# Altium PCB FPGA_Quatro_PCB.PcbDoc (part 1 of 2)
Units mil, origin at the board's own origin, x right, y up, seen from the top; angles counter-clockwise.
Board outline 4724.41 x 3937.01 mil, 4 copper layers (Top Layer, Layer 2, Layer 3, Bottom Layer), stack 65.634 mil thick; 119 components, 184 nets, 749 pads, 206 vias.
Unrouted connection lines stored in the file: 83.
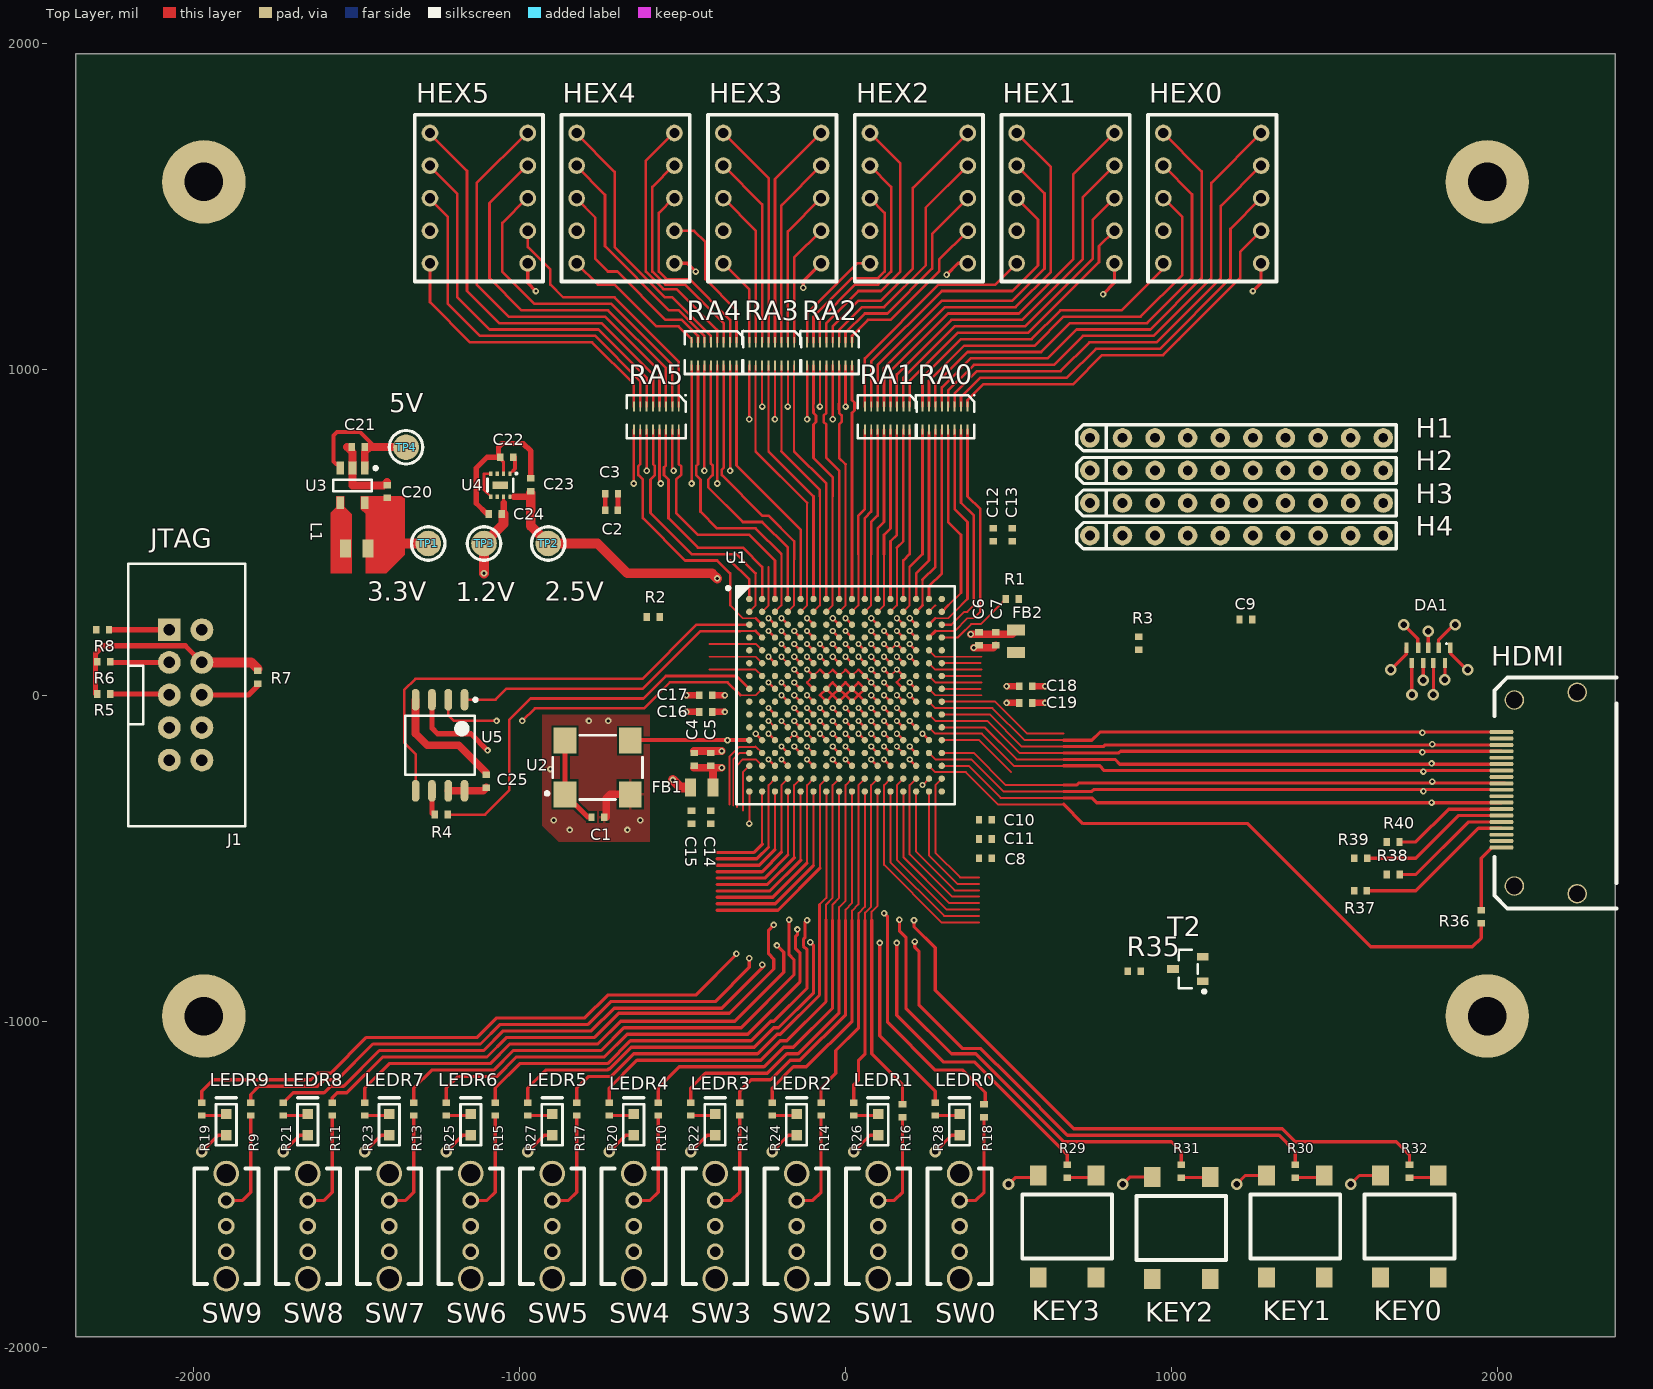
[diagram p0: Top Layer view]
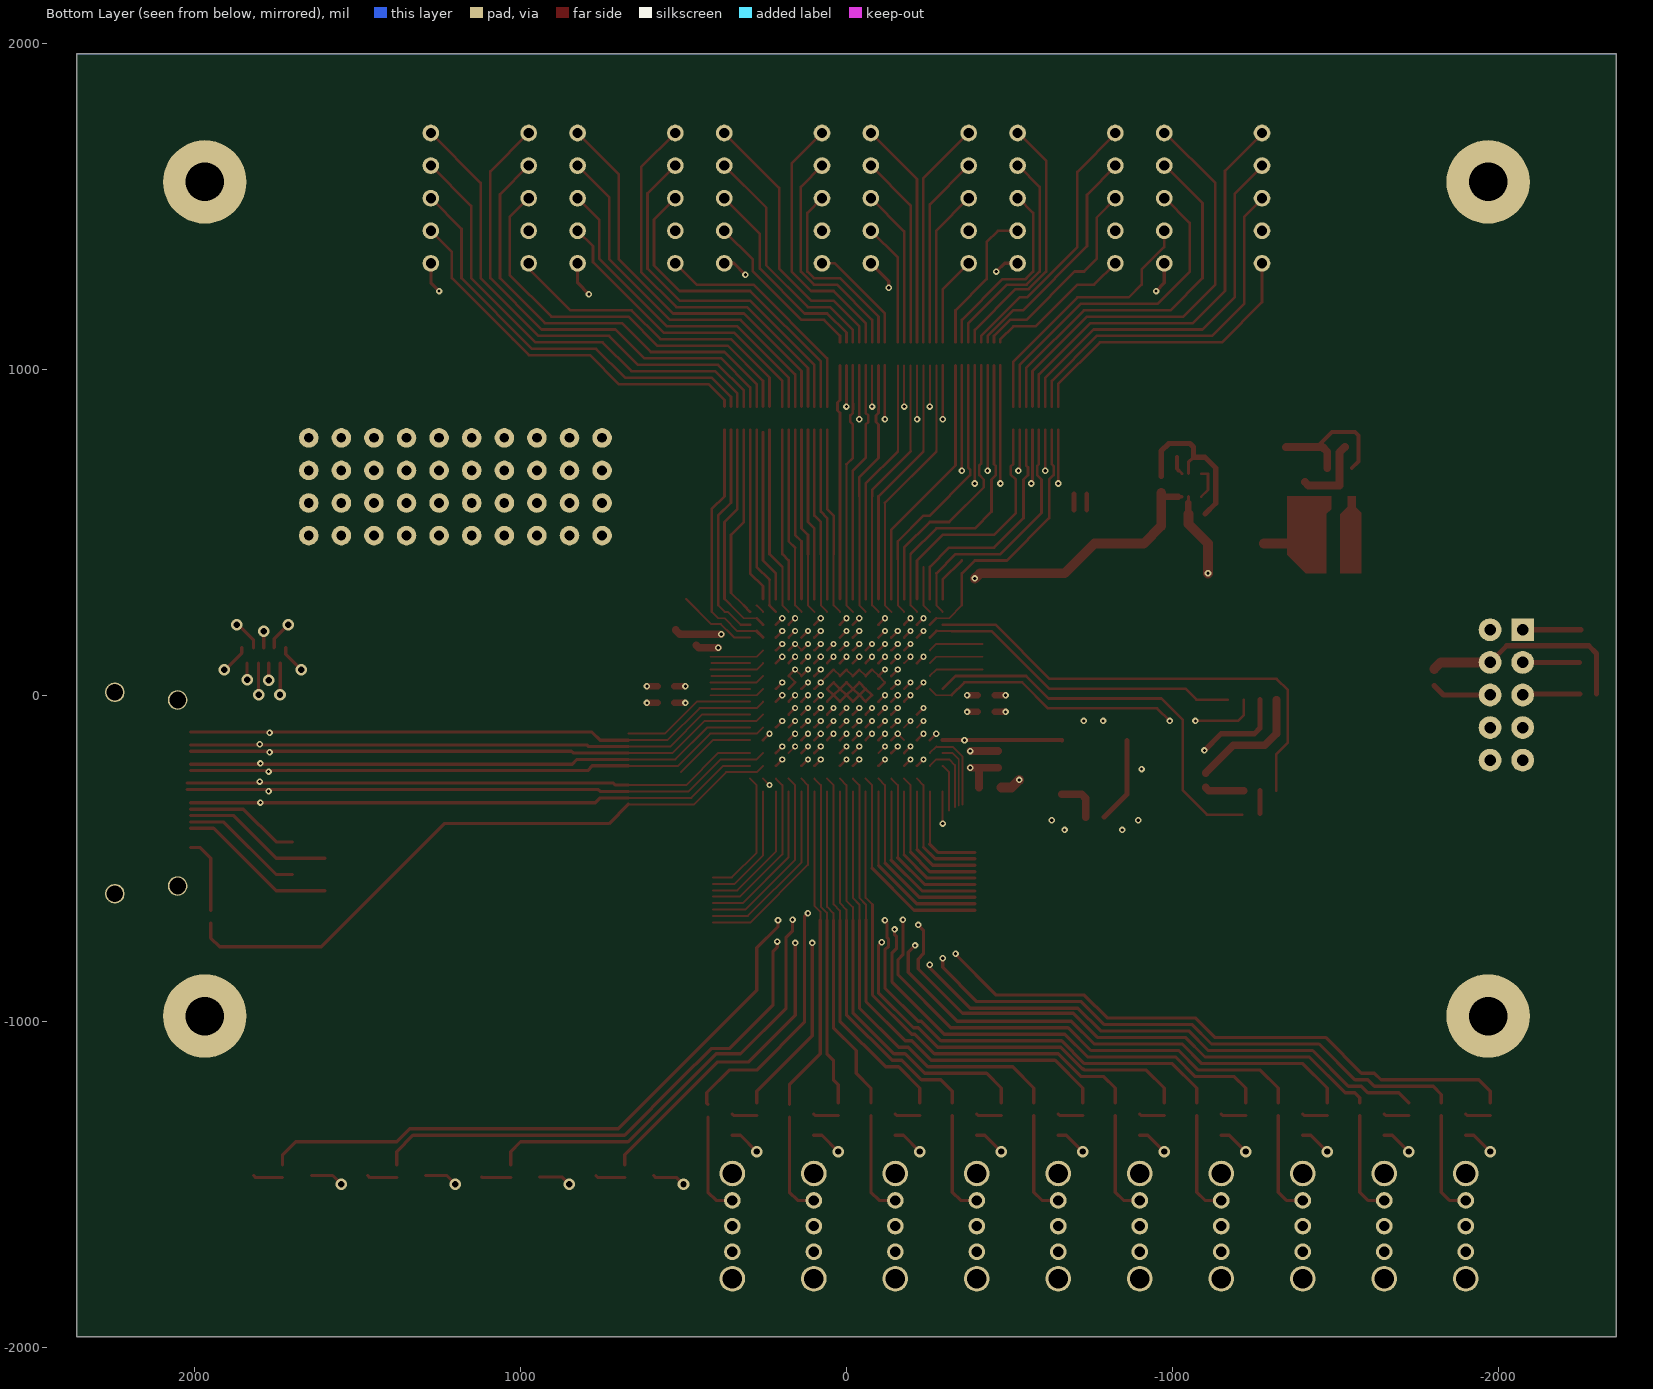
[diagram p1: Bottom Layer view, seen from below]
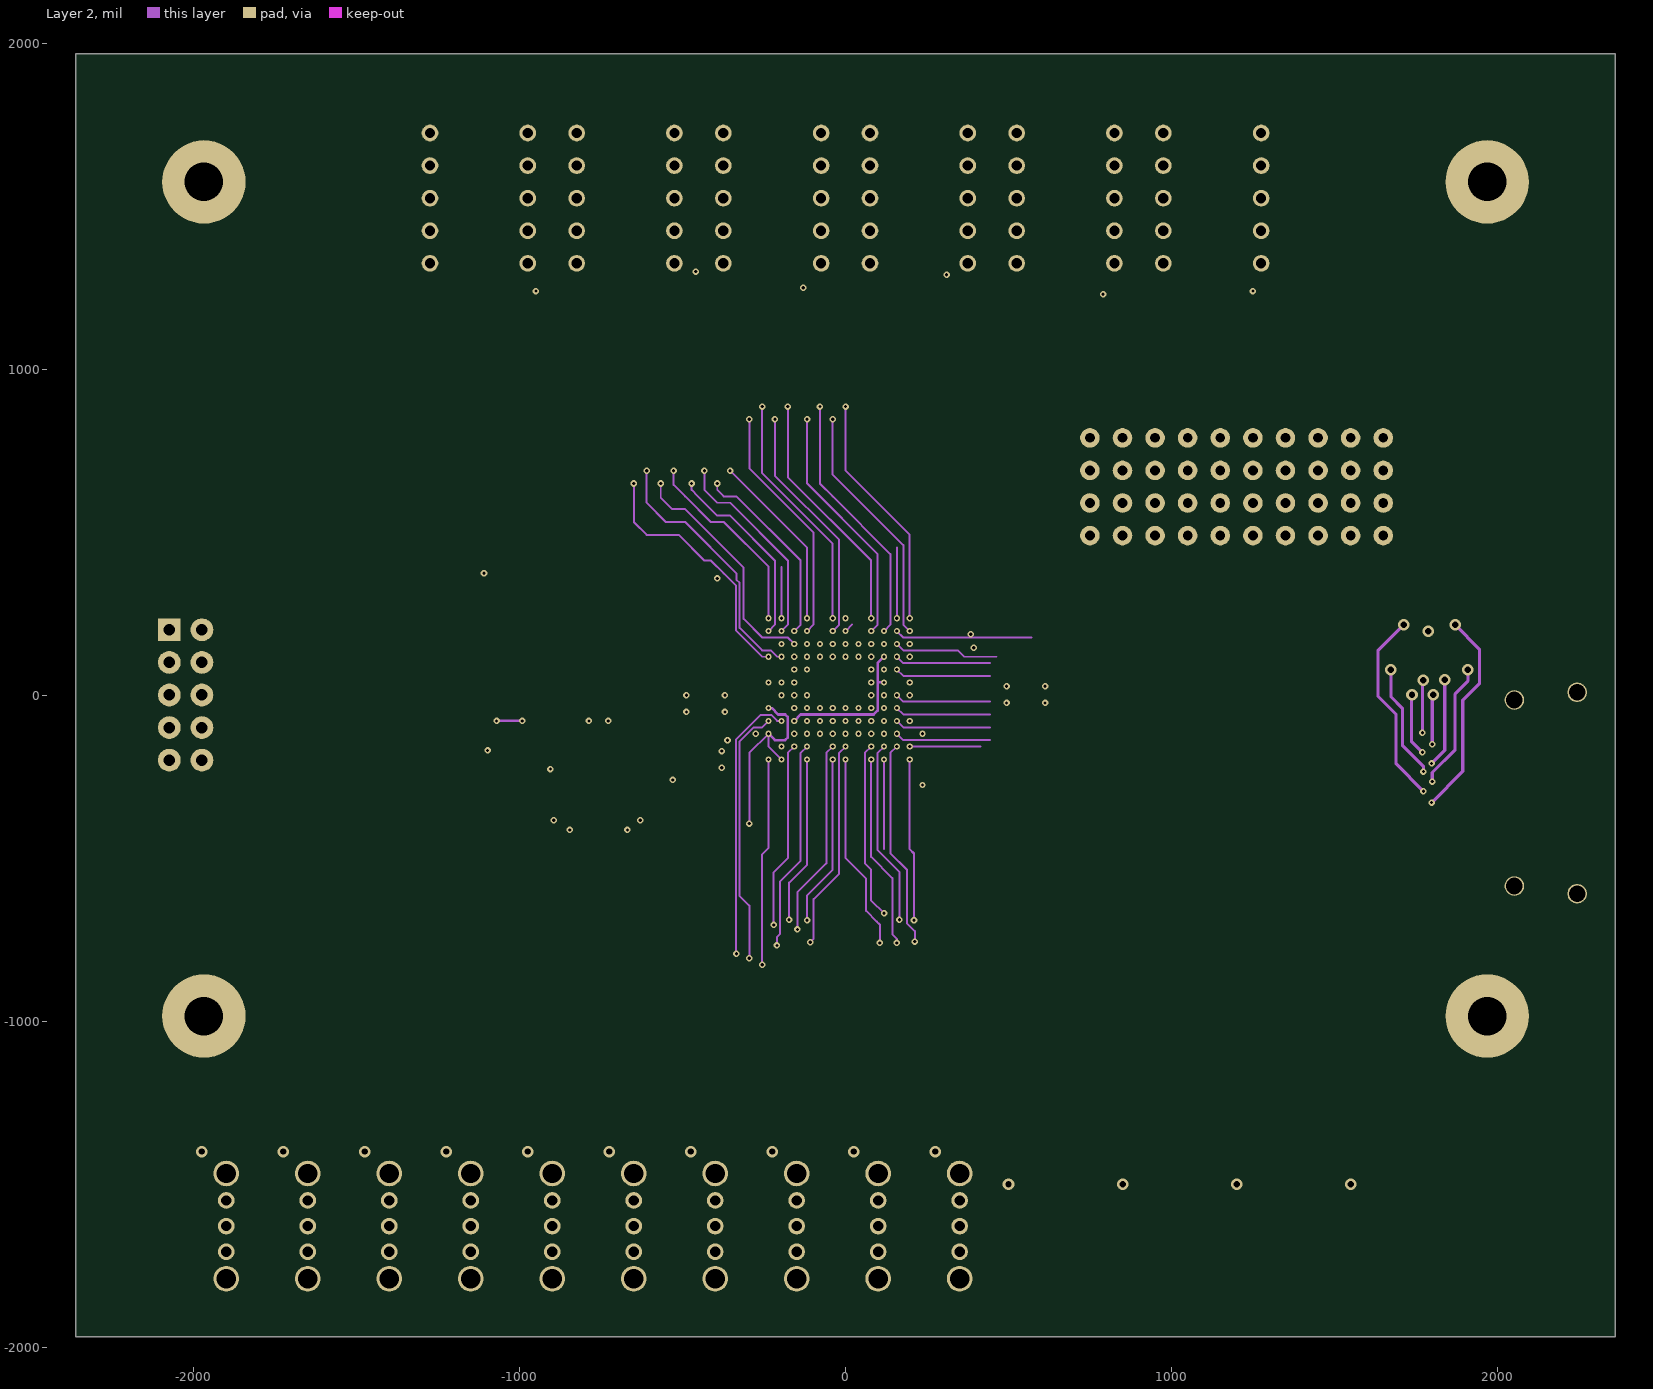
[diagram p2: Layer 2]
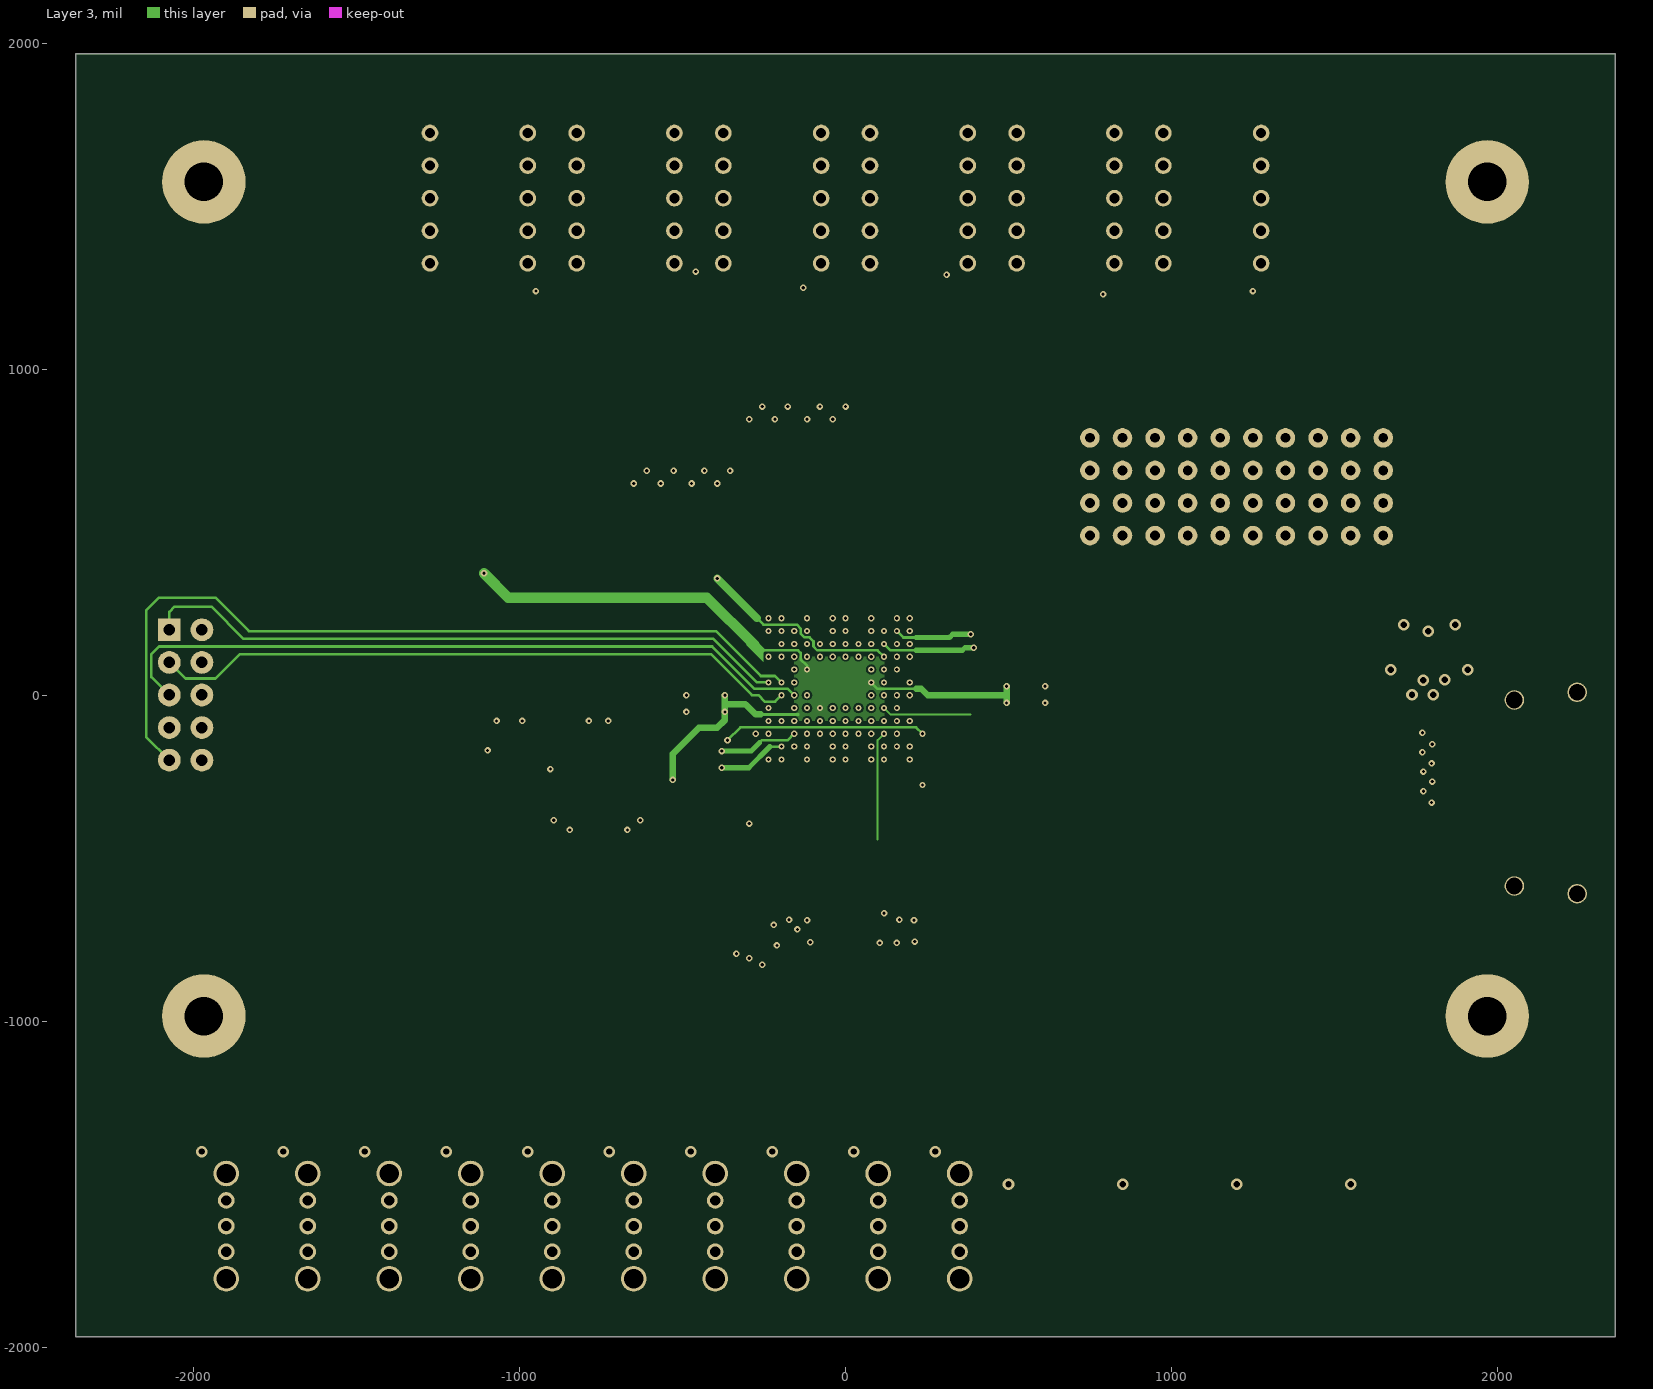
[diagram p3: Layer 3]
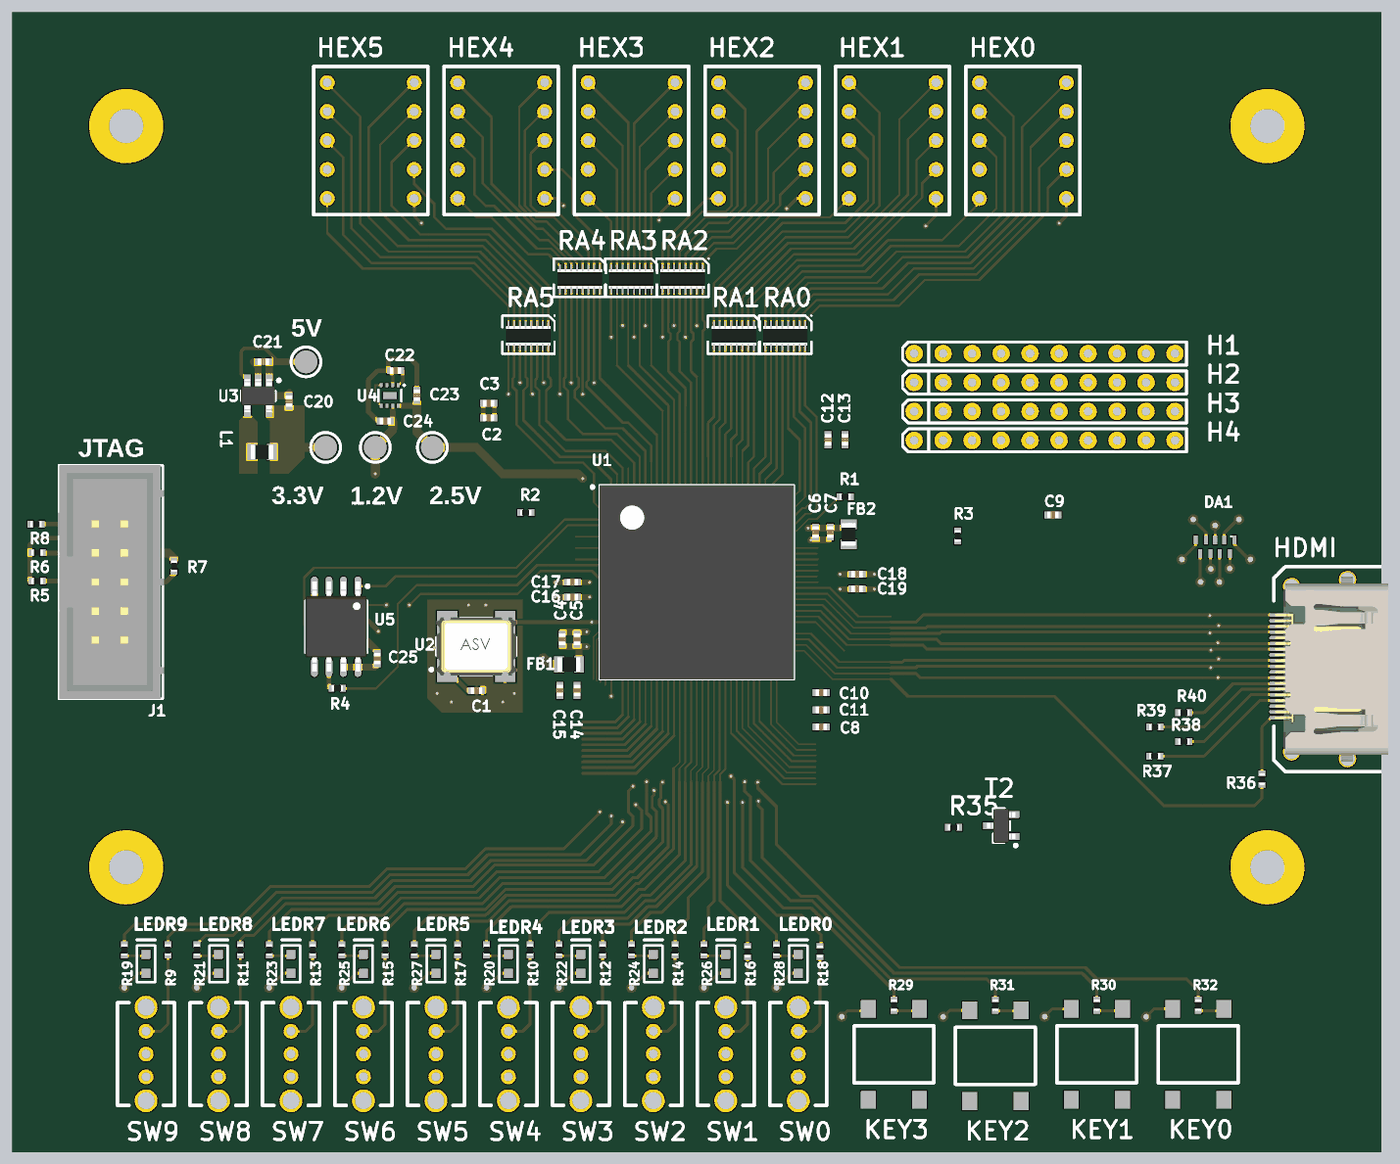
[diagram p5: 3D render of the assembled board from above, using the file's embedded part models]

## Layer stack, top to bottom
Top Solder: solder mask 0.4, Solder Resist, Dk 3.5
Top Layer: signal copper 1.4
Dielectric 1: prepreg 5, FR-4, Dk 4.2
Layer 2: signal copper 1.417
Dielectric 2: core 50, Dk 4.2
Layer 3: signal copper 1.417
Dielectric 3: prepreg 5, Dk 4.2
Bottom Layer: signal copper 1.4
Bottom Solder: solder mask 0.4, Solder Resist, Dk 3.5

## Board outline
-2362.2,-1968.5 2362.2,-1968.5 2362.2,1968.5 -2362.2,1968.5

## Design rules (kind name [scope] priority, off if disabled: settings)
BoardOutlineClearance [All] p1: gap=40 ignorepadtopadclearanceinfootprint=FALSE
Clearance [All] p1: gap=6 ignorepadtopadclearanceinfootprint=FALSE except(0: Arc-Hole Track-Hole SMDPad-Hole THPad-Hole Via-Hole Fill-Hole Poly-Hole Region-Hole Text-Hole)
ComponentClearance [All] p1: gap=9 collisioncheckmode=3 verticalgap=100000 showdistances=FALSE
PolygonConnect Polygon-Via [All vs IsVia] p1: connectstyle=Direct reliefconductorwidth=10 reliefentries=4 polygonreliefangle="90 Angle" airgapwidth=10
PolygonConnect [All] p2: connectstyle=Relief reliefconductorwidth=10 reliefentries=4 polygonreliefangle="90 Angle" airgapwidth=6
RoutingVias [All] p1: holewidth=10 width=20 viastyle="Through Hole" minholewidth=10 minwidth=19 maxholewidth=300 maxwidth=393.7
SilkToSilkClearance [All] p1: silktosilkclearance=8
SolderMaskExpansion [All] p1: expansion=4
Width [All] p1: maxlimit=500 minlimit=6 preferedwidth=10
28 further rules are at their usual default settings.

## Classes and differential pairs
component class HDMI: DA1 HDMI R36 R37 R38 R39 R40
component class Headers: H1 H2 H3 H4
component class Switch: R9 R10 R11 R12 R13 R14 R15 R16 R17 R18 SW0 SW1 SW2 SW3 SW4 SW5 SW6 SW7 SW8 SW9
component class SevenSeg: HEX0 HEX1 HEX2 HEX3 HEX4 HEX5 RA0 RA1 RA2 RA3 RA4 RA5
component class LED: LEDR0 LEDR1 LEDR2 LEDR3 LEDR4 LEDR5 LEDR6 LEDR7 LEDR8 LEDR9 R19 R20 R21 R22 R23 R24 R25 R26 R27 R28
component class Buttons: KEY0 KEY1 KEY2 KEY3 R29 R30 R31 R32
component class "Cyclone IV E": C1 C2 C3 C4 C5 C6 C7 C8 C9 C10 C11 C12 C13 C14 C15 C16 C17 C18 C19 C25 FB1 FB2 R1 R2 R3 R4 U1 U2 U5
component class Power: C20 C21 C22 C23 C24 L1 R35 T2 TP1 TP2 TP3 TP4 U3 U4
component class FPGA_Quatro_SCH_main: J1 R5 R6 R7 R8

## Components (designator, comment, footprint, x,y, rotation, side; value= is the part's Value field where it differs from the comment)
C1 "100nF" CAP0402R -759.84,-374.02 r0 top
C2 "100nF" CAP0402R -718.03,567.72 r0 top
C3 "100nF" CAP0402R -717.72,617.72 r0 top
C4 "100nF" CAP0402R -464.57,-196.85 r90 top
C5 "100nF" CAP0402R -413.39,-196.85 r90 top
C6 "100nF" CAP0402R 409.45,173.23 r270 top
C7 "100nF" CAP0402R 460.63,173.23 r270 top
C8 "100nF" CAP0402R 429.13,-500 r0 top
C9 "100nF" CAP0402R 1228.35,232.28 r0 top
C10 "100nF" CAP0402R 429.13,-381.89 r0 top
C11 "100nF" CAP0402R 429.13,-440.94 r0 top
C12 "100nF" CAP0402R 452.76,492.13 r90 top
C13 "100nF" CAP0402R 511.81,492.13 r90 top
C14 "100nF" CAP0402R -413.39,-374.02 r270 top
C15 "100nF" CAP0402R -472.44,-374.02 r270 top
C16 "100nF" CAP0402R -429.13,-51.18 r180 top
C17 "100nF" CAP0402R -429.13,0 r180 top
C18 "100nF" CAP0402R 553.15,27.56 r0 top
C19 "100nF" CAP0402R 553.15,-23.62 r0 top
C20 "100nF" CAP0402R -1406.5,625 r90 top
C21 "100nF" CAP0402R -1495.08,761.81 r180 top
C22 "100nF" CAP0402R -1039.37,730.31 r180 top
C23 "100nF" CAP0402R -965.55,645.67 r90 top
C24 "100nF" CAP0402R -1074.8,556.1 r180 top
C25 "100nF" CAP0402R -1102.36,-263.78 r90 top
DA1 "SP7538PUTG" 9-UDFN 1787.99,122.44 r180 top
FB1 "Value" RES0805R -440.94,-283.46 r0 top
FB2 "Value" RES0805R 523.62,165.35 r90 top
H1 "H 10x1" H10 1199.72,789.72 r0 top
H2 "H 10x1" H10 1199.72,689.72 r0 top
H3 "H 10x1" H10 1199.72,589.72 r0 top
H4 "H 10x1" H10 1199.72,489.72 r0 top
HDMI "HDMI" HDMI 2050,-300 r90 top
HEX0 "7-Segment display" Seven_Seg_INND-TS40 1125,1525 r0 top
HEX1 "7-Segment display" Seven_Seg_INND-TS40 675,1525 r0 top
HEX2 "7-Segment display" Seven_Seg_INND-TS40 225,1525 r0 top
HEX3 "7-Segment display" Seven_Seg_INND-TS40 -225,1525 r0 top
HEX4 "7-Segment display" Seven_Seg_INND-TS40 -675,1525 r0 top
HEX5 "7-Segment display" Seven_Seg_INND-TS40 -1125,1525 r0 top
J1 "JTAG" BOXEDVERT10 -2074.8,200.79 r270 top
KEY0 "Button" But_PTS645SMT 1730,-1630 r90 top
KEY1 "Button" But_PTS645SMT 1380,-1630 r90 top
KEY2 "Button" But_PTS645SMT 1029.98,-1634.73 r90 top
KEY3 "Button" But_PTS645SMT 680,-1630 r90 top
L1 "1uH" RES0805R -1500,450 r0 top
LEDR0 "LED" LED0603 350,-1317.52 r270 top
LEDR1 "LED" LED0603 100,-1317.52 r270 top
LEDR2 "LED" LED0603 -150,-1317.52 r270 top
LEDR3 "LED" LED0603 -400,-1317.52 r270 top
LEDR4 "LED" LED0603 -650,-1317.52 r270 top
LEDR5 "LED" LED0603 -900,-1317.52 r270 top
LEDR6 "LED" LED0603 -1150,-1317.52 r270 top
LEDR7 "LED" LED0603 -1400,-1317.52 r270 top
LEDR8 "LED" LED0603 -1650,-1317.52 r270 top
LEDR9 "LED" LED0603 -1900,-1317.52 r270 top
R1 "510K" RES0402R 511.81,295.27 r0 top
R2 "510K" RES0402R -590,240 r180 top
R3 "510K" RES0402R 900,159.68 r90 top
R4 "510K" RES0402R -1240.16,-366.14 r180 top
R5 "510K" RES0402R -2275.59,3.94 r180 top
R6 "510K" RES0402R -2275.59,102.36 r180 top
R7 "510K" RES0402R -1803.15,55.12 r270 top
R8 "510K" RES0402R -2279.53,200.79 r0 top
R9 "510K" RES0402R -1825,-1269.68 r270 top
R10 "510K" RES0402R -575,-1269.68 r270 top
R11 "510K" RES0402R -1575,-1269.68 r270 top
R12 "510K" RES0402R -325,-1269.68 r270 top
R13 "510K" RES0402R -1325,-1269.68 r270 top
R14 "510K" RES0402R -75,-1269.68 r270 top
R15 "510K" RES0402R -1075,-1269.68 r270 top
R16 "510K" RES0402R 175,-1275 r270 top
R17 "510K" RES0402R -825,-1269.68 r270 top
R18 "510K" RES0402R 425,-1275 r270 top
R19 "510K" RES0402R -1975,-1269.68 r90 top
R20 "510K" RES0402R -725,-1269.68 r90 top
R21 "510K" RES0402R -1725,-1269.68 r90 top
R22 "510K" RES0402R -475,-1269.68 r90 top
R23 "510K" RES0402R -1475,-1269.68 r90 top
R24 "510K" RES0402R -225,-1269.68 r90 top
R25 "510K" RES0402R -1225,-1269.68 r90 top
R26 "510K" RES0402R 25,-1269.68 r90 top
R27 "510K" RES0402R -975,-1269.68 r90 top
R28 "510K" RES0402R 275,-1269.68 r90 top
R29 "510K" RES0402R 680,-1460.31 r270 top
R30 "510K" RES0402R 1380,-1460.31 r270 top
R31 "510K" RES0402R 1030,-1460.31 r270 top
R32 "510K" RES0402R 1730,-1460.31 r270 top
R35 "510K" RES0402R 885.83,-846.46 r0 top
R36 "0" RES0402R 1950,-680 r270 top
R37 "0" RES0402R 1580,-600 r180 top
R38 "0" RES0402R 1680.32,-550 r180 top
R39 "0" RES0402R 1580.32,-500 r180 top
R40 "0" RES0402R 1680,-450 r180 top
RA0 "Resistor Array" EXB-2HV 305.12,850.39 r270 top value=560
RA1 "Resistor Array" EXB-2HV 127.95,850.39 r270 top value=560
RA2 "Resistor Array" EXB-2HV -49.21,1047.24 r270 top value=560
RA3 "Resistor Array" EXB-2HV -226.38,1047.24 r270 top value=560
RA4 "Resistor Array" EXB-2HV -403.54,1047.24 r270 top value=560
RA5 "Resistor Array" EXB-2HV -580.71,850.39 r270 top value=560
SW0 "SW" SW_OS102011MS2Q 350,-1628.74 r270 top
SW1 "SW" SW_OS102011MS2Q 100,-1628.74 r270 top
SW2 "SW" SW_OS102011MS2Q -150,-1628.74 r270 top
SW3 "SW" SW_OS102011MS2Q -400,-1628.74 r270 top
SW4 "SW" SW_OS102011MS2Q -650,-1628.74 r270 top
SW5 "SW" SW_OS102011MS2Q -900,-1628.74 r270 top
SW6 "SW" SW_OS102011MS2Q -1150,-1628.74 r270 top
SW7 "SW" SW_OS102011MS2Q -1400,-1628.74 r270 top
SW8 "SW" SW_OS102011MS2Q -1650,-1628.74 r270 top
SW9 "SW" SW_OS102011MS2Q -1900,-1628.74 r270 top
T2 "P MOSFT" SOT23_PMV48XP 1050,-840 r180 top
TP1 "TestPoint" TestPoint -1280.51,465.55 r270 top
TP2 "TestPoint" TestPoint -912.4,465.55 r0 top
TP3 "TestPoint" TestPoint -1109.25,465.55 r0 top
TP4 "TestPoint" TestPoint -1348.43,760.83 r270 top
U1 "EP4CE6F17C8" FBGA256 0,0 r0 top locked
U2 "Oscillator" CRYSTAL_7X5 -760.83,-221.46 r0 top
U3 "MCP1603T-330I/OS" SOT23-5 -1512.8,643.72 r270 top
U4 "MIC5331" TDFN22 -1059.06,644.69 r180 top
U5 "IS25LP064A" SOIC-8 -1244.09,-153.54 r270 top

## Footprints (in the part's own frame and the unit in brackets; to place one, negate y for a bottom-side part, rotate by r counter-clockwise, add the part's x,y. Pads: shape width x height; smd on the part's side, far side on the other; paste and mask are expansions set on the pad)
9-UDFN [mm] "Chip Array, Flat, 9-Leads, Pitch 0.80mm,  Body 3.80x1.00mm,  IPC Medium Density"
  rect 0.35x0.8 smd: 1(-1.7,-0.6) 2(-0.8,-0.6) 3(0,-0.6) 4(0.8,-0.6) 5(1.7,-0.6) 6(1.3,0.6) 7(0.4,0.6) 8(-0.4,0.6) 9(-1.3,0.6)
  silkscreen extent -1.46,-0.96 -1.36,-0.86, body extent -1.95,-0.55 1.95,0.55, height 0.55
BOXEDVERT10 [mil] "IDC Header 2.54mm Boxed 10 pins"
  rect 70x70 hole 35.43: 1(0,0)
  round 70 hole 35.43: 2(0,100) 3(100,0) 4(100,100) 5(200,0) 6(200,100) 7(300,0) 8(300,100) 9(400,0) 10(400,100)
  silkscreen extent -203,-126 603,232, body extent -204,-129 604,237, height 359
But_PTS645SMT [mm]
  rect 1.55x1.3 smd: 1(-3.975,2.25) 2(3.975,2.25) 3(-3.975,-2.25) 4(3.975,-2.25)
  silkscreen extent -2.5,-3.5 2.5,3.5, body extent -4.5,-3 4.5,3, height 4.3
CAP0402R [mm] "Capacitor 0402 reflow soldering"
  rect 0.5x0.6 smd: 1(-0.5,0) 2(0.5,0)
  body extent -0.5,-0.3 0.5,0.3, height 0.2
CRYSTAL_7X5 [mil]
  rect 70x80 smd: 1(-100,-82.5) 2(100,-82.5) 3(100,82.5) 4(-100,82.5)
  silkscreen extent -160,-98 138,98, body extent -138,-100 138,100, height 71
EXB-2HV [mm] "Panasonic 8 Res Convex SMD 1506"
  rect 0.8x0.15 smd: 1(-0.9,1.75) 2(-0.9,1.25) 3(-0.9,0.75) 4(-0.9,0.25) 5(-0.9,-0.25) 6(-0.9,-0.75) 7(-0.9,-1.25) 8(-0.9,-1.75) 9(0.9,-1.75) 10(0.9,-1.25) 11(0.9,-0.75) 12(0.9,-0.25) 13(0.9,0.25) 14(0.9,0.75) 15(0.9,1.25) 16(0.9,1.75)
  silkscreen extent -1.83,-2.29 1.57,2.34, body extent -0.9,-1.95 0.9,1.95, height 0.55
FBGA256 [mm] "BGA, 256-Leads, Body 17x17mm, Pitch 1mm"
  round 0.5 smd: A1(-7.5,7.5) A2(-6.5,7.5) A3(-5.5,7.5) A4(-4.5,7.5) A5(-3.5,7.5) A6(-2.5,7.5) A7(-1.5,7.5) A8(-0.5,7.5) A9(0.5,7.5) A10(1.5,7.5) A11(2.5,7.5) A12(3.5,7.5) A13(4.5,7.5) A14(5.5,7.5) A15(6.5,7.5) A16(7.5,7.5) B1(-7.5,6.5) B2(-6.5,6.5) B3(-5.5,6.5) B4(-4.5,6.5) B5(-3.5,6.5) B6(-2.5,6.5) B7(-1.5,6.5) B8(-0.5,6.5) B9(0.5,6.5) B10(1.5,6.5) B11(2.5,6.5) B12(3.5,6.5) B13(4.5,6.5) B14(5.5,6.5) B15(6.5,6.5) B16(7.5,6.5) C1(-7.5,5.5) C2(-6.5,5.5) C3(-5.5,5.5) C4(-4.5,5.5) C5(-3.5,5.5) C6(-2.5,5.5) C7(-1.5,5.5) C8(-0.5,5.5) C9(0.5,5.5) C10(1.5,5.5) C11(2.5,5.5) C12(3.5,5.5) C13(4.5,5.5) C14(5.5,5.5) C15(6.5,5.5) C16(7.5,5.5) D1(-7.5,4.5) D2(-6.5,4.5) D3(-5.5,4.5) D4(-4.5,4.5) D5(-3.5,4.5) D6(-2.5,4.5) D7(-1.5,4.5) D8(-0.5,4.5) D9(0.5,4.5) D10(1.5,4.5) D11(2.5,4.5) D12(3.5,4.5) D13(4.5,4.5) D14(5.5,4.5) D15(6.5,4.5) D16(7.5,4.5) E1(-7.5,3.5) E2(-6.5,3.5) E3(-5.5,3.5) E4(-4.5,3.5) E5(-3.5,3.5) E6(-2.5,3.5) E7(-1.5,3.5) E8(-0.5,3.5) E9(0.5,3.5) E10(1.5,3.5) E11(2.5,3.5) E12(3.5,3.5) E13(4.5,3.5) E14(5.5,3.5) E15(6.5,3.5) E16(7.5,3.5) F1(-7.5,2.5) F2(-6.5,2.5) F3(-5.5,2.5) F4(-4.5,2.5) F5(-3.5,2.5) F6(-2.5,2.5) F7(-1.5,2.5) F8(-0.5,2.5) F9(0.5,2.5) F10(1.5,2.5) F11(2.5,2.5) F12(3.5,2.5) F13(4.5,2.5) F14(5.5,2.5) F15(6.5,2.5) F16(7.5,2.5) G1(-7.5,1.5) G2(-6.5,1.5) G3(-5.5,1.5) G4(-4.5,1.5) G5(-3.5,1.5) G6(-2.5,1.5) G7(-1.5,1.5) G8(-0.5,1.5) G9(0.5,1.5) G10(1.5,1.5) G11(2.5,1.5) G12(3.5,1.5) G13(4.5,1.5) G14(5.5,1.5) G15(6.5,1.5) G16(7.5,1.5) H1(-7.5,0.5) H2(-6.5,0.5) H3(-5.5,0.5) H4(-4.5,0.5) H5(-3.5,0.5) H6(-2.5,0.5) H7(-1.5,0.5) H8(-0.5,0.5) H9(0.5,0.5) H10(1.5,0.5) H11(2.5,0.5) H12(3.5,0.5) H13(4.5,0.5) H14(5.5,0.5) H15(6.5,0.5) H16(7.5,0.5) J1(-7.5,-0.5) J2(-6.5,-0.5) J3(-5.5,-0.5) J4(-4.5,-0.5) J5(-3.5,-0.5) J6(-2.5,-0.5) J7(-1.5,-0.5) J8(-0.5,-0.5) J9(0.5,-0.5) J10(1.5,-0.5) J11(2.5,-0.5) J12(3.5,-0.5) J13(4.5,-0.5) J14(5.5,-0.5) J15(6.5,-0.5) J16(7.5,-0.5) K1(-7.5,-1.5) K2(-6.5,-1.5) K3(-5.5,-1.5) K4(-4.5,-1.5) K5(-3.5,-1.5) K6(-2.5,-1.5) K7(-1.5,-1.5) K8(-0.5,-1.5) K9(0.5,-1.5) K10(1.5,-1.5) K11(2.5,-1.5) K12(3.5,-1.5) K13(4.5,-1.5) K14(5.5,-1.5) K15(6.5,-1.5) K16(7.5,-1.5) L1(-7.5,-2.5) L2(-6.5,-2.5) L3(-5.5,-2.5) L4(-4.5,-2.5) L5(-3.5,-2.5) L6(-2.5,-2.5) L7(-1.5,-2.5) L8(-0.5,-2.5) L9(0.5,-2.5) L10(1.5,-2.5) L11(2.5,-2.5) L12(3.5,-2.5) L13(4.5,-2.5) L14(5.5,-2.5) L15(6.5,-2.5) L16(7.5,-2.5) M1(-7.5,-3.5) M2(-6.5,-3.5) M3(-5.5,-3.5) M4(-4.5,-3.5) M5(-3.5,-3.5) M6(-2.5,-3.5) M7(-1.5,-3.5) M8(-0.5,-3.5) M9(0.5,-3.5) M10(1.5,-3.5) M11(2.5,-3.5) M12(3.5,-3.5) M13(4.5,-3.5) M14(5.5,-3.5) M15(6.5,-3.5) M16(7.5,-3.5) N1(-7.5,-4.5) N2(-6.5,-4.5) N3(-5.5,-4.5) N4(-4.5,-4.5) N5(-3.5,-4.5) N6(-2.5,-4.5) N7(-1.5,-4.5) N8(-0.5,-4.5) N9(0.5,-4.5) N10(1.5,-4.5) N11(2.5,-4.5) N12(3.5,-4.5) N13(4.5,-4.5) N14(5.5,-4.5) N15(6.5,-4.5) N16(7.5,-4.5) P1(-7.5,-5.5) P2(-6.5,-5.5) P3(-5.5,-5.5) P4(-4.5,-5.5) P5(-3.5,-5.5) P6(-2.5,-5.5) P7(-1.5,-5.5) P8(-0.5,-5.5) P9(0.5,-5.5) P10(1.5,-5.5) P11(2.5,-5.5) P12(3.5,-5.5) P13(4.5,-5.5) P14(5.5,-5.5) P15(6.5,-5.5) P16(7.5,-5.5) R1(-7.5,-6.5) R2(-6.5,-6.5) R3(-5.5,-6.5) R4(-4.5,-6.5) R5(-3.5,-6.5) R6(-2.5,-6.5) R7(-1.5,-6.5) R8(-0.5,-6.5) R9(0.5,-6.5) R10(1.5,-6.5) R11(2.5,-6.5) R12(3.5,-6.5) R13(4.5,-6.5) R14(5.5,-6.5) R15(6.5,-6.5) R16(7.5,-6.5) T1(-7.5,-7.5) T2(-6.5,-7.5) T3(-5.5,-7.5) T4(-4.5,-7.5) T5(-3.5,-7.5) T6(-2.5,-7.5) T7(-1.5,-7.5) T8(-0.5,-7.5) T9(0.5,-7.5) T10(1.5,-7.5) T11(2.5,-7.5) T12(3.5,-7.5) T13(4.5,-7.5) T14(5.5,-7.5) T15(6.5,-7.5) T16(7.5,-7.5)
  silkscreen extent -9.27,-8.5 8.5,8.5, body extent -8.5,-8.5 8.5,8.5, height 1.45
H10 [mil] "Headers 0.1mil pitch"
  round 60 hole 30: 1(-450,0) 2(-350,0) 3(-250,0) 4(-150,0) 5(-50,0) 6(50,0) 7(150,0) 8(250,0) 9(350,0) 10(450,0)
  silkscreen extent -490,-40 490,40, body extent -495,-45 495,45, height 335
HDMI [mm] "Amphenol HDMI HDMI™ 1.4 Receptacle Connector 19 Position Surface Mount, Right Angle; Through Hole"
  oct 0.3x1.9 smd: 1(4.75,0.95) 2(4.25,0.95) 3(3.75,0.95) 4(3.25,0.95) 5(2.75,0.95) 6(2.25,0.95) 7(1.75,0.95) 8(1.25,0.95) 9(0.75,0.95) 10(0.25,0.95) 11(-0.25,0.95) 12(-0.75,0.95) 13(-1.25,0.95) 14(-1.75,0.95) 15(-2.25,0.95) 16(-2.75,0.95) 17(-3.25,0.95) 18(-3.75,0.95) 19(-4.25,0.95)
  round 1.524 hole 1.3: SHLD(-7.85,-4.95) SHLD(-7.25,-0.05) SHLD(7.25,-0.05) SHLD(7.85,-4.95)
  silkscreen extent -9,-8 9,1.5, body extent -8.1,-8.5 8.1,1.4, height 6.18
LED0603 [mm] "ROHM LED 0603 SML-D12x1 Series"
  rect 0.8x0.8 smd: A(-0.825,0) K(0.825,0)
  silkscreen extent -2.1,-0.8 1.6,0.8, body extent -0.8,-0.4 0.8,0.4, height 0.55
RES0402R [mm] "resistor 0402 reflow soldering"
  rect 0.5x0.6 smd: 1(-0.5,0) 2(0.5,0)
  body extent -0.5,-0.25 0.5,0.25, height 0.3
RES0805R [mm] "resistor 0805 reflow soldering"
  rect 0.85x1.4 smd: 1(-0.875,0) 2(0.875,0)
  body extent -1,-0.62 1,0.63, height 0.5
Seven_Seg_INND-TS40 [mm]
  round 1.3 hole 0.8: 1(-3.81,5.08) 2(-3.81,2.54) 3(-3.81,0) 4(-3.81,-2.54) 5(-3.81,-5.08) 6(3.81,-5.08) 7(3.81,-2.54) 8(3.81,0) 9(3.81,2.54) 10(3.81,5.08)
  silkscreen extent -5,-6.5 5,6.5, body extent -4.83,-6.45 4.82,6.45, height 6.38
SOIC-8 [mm] "SOIC, 8-Leads, Body 5,28x5,28mm, Pitch 1,27mm, IPC Medium Density"
  oval 1.7x0.6 smd: 1(-3.55,1.905) 2(-3.55,0.635) 3(-3.55,-0.635) 4(-3.55,-1.905) 5(3.55,-1.905) 6(3.55,-0.635) 7(3.55,0.635) 8(3.55,1.905)
  silkscreen extent -3.67,-2.7 2.3,2.88, body extent -3.95,-2.7 3.95,2.7, height 2.16
SOT23-5 [mm] "SOT23, 5-Leads, Body 2,90x2,80mm, Pitch 0,95mm, IPC Medium Density"
  rect 1x0.6 smd: 1(-1.35,0.95) 2(-1.35,0) 3(-1.35,-0.95) 4(1.35,-0.95) 5(1.35,0.95)
  silkscreen extent -1.47,-1.5 0.45,1.93, body extent -1.45,-1.5 1.45,1.5, height 1.1
SOT23_PMV48XP [mm] "SOT23, 3-Leads, Body 2.90x2.30mm, Pitch 0.95mm, IPC Medium Density, PMV48XP"
  rect 0.9x0.6 smd: 1(-1.15,0.95) 2(-1.15,-0.95) 3(1.15,0)
  silkscreen extent -1.4,-1.5 0.7,1.87, body extent -1.25,-1.5 1.25,1.5, height 1.1
SW_OS102011MS2Q [mm]
  round 1.3 hole 0.8: 1(-2,0) 2(0,0) 3(2,0)
  round 2 hole 1.5: NC(-4.1,0) NC(4.1,0)
  silkscreen extent -4.5,-2.5 4.5,2.5, body extent -4.3,-2.15 4.28,2.13, height 8
TDFN22 [mm] "2mm x 2mm TDFN"
  rect 0.25x0.35 smd: 1(-0.75,-0.9) 2(-0.25,-0.9) 3(0.25,-0.9) 4(0.75,-0.9) 5(0.75,0.9) 6(0.25,0.9) 7(-0.25,0.9) 8(-0.75,0.9)
  rect 1.2x0.6 smd: 9(0,0)
  silkscreen extent -1.31,-0.96 1,0.5, body extent -1,-1 1,1, height 0.56
TestPoint [mm] "Test Point"
  round 2 smd: 0(0,0)
  silkscreen extent -1.3,-1.3 1.3,1.3

## Part data
C1 C2 C3 C4 C5 C6 C7 C8 C9 C10 C11 C12 C13 C14 C15 C16 C17 C18 C19 C20 C21 C22 C23 C24 C25: library part C, "Capacitor", Class I=Passive, Revision="July-2002: Re-released for DXP Platform."
DA1: library part "TVS ARRAY", "Littelfuse Inc. SP7538PUTG"
FB1 FB2: library part Ferrite_Bead, "Ferrite Bead"
H1 H2 H3 H4: library part H10, "0.1mil pitch header"
HDMI: "19 Pin HDMI"
HEX0 HEX1 HEX2 HEX3 HEX4 HEX5: library part SevenSeg, Color=Red, Common Pin="Common Anode"
J1: library part JTAG_CON, "JTAG connector"
KEY0 KEY1 KEY2 KEY3: library part BUT, Switching=off-mom
L1: library part L, "Inductor"
LEDR0 LEDR1 LEDR2 LEDR3 LEDR4 LEDR5 LEDR6 LEDR7 LEDR8 LEDR9: "LED Red"
R1 R2 R3 R4 R5 R6 R7 R8 R9 R10 R11 R12 R13 R14 R15 R16 R17 R18 R19 R20 R21 R22 R23 R24 R25 R26 R27 R28 R29 R30 R31 R32 R35 R36 R37 R38 R39 R40: library part R, "Resistor"
RA0 RA1 RA2 RA3 RA4 RA5: library part "Res Array", "Resistor Array with 8 Isolated Resistors", Num of Resistors=8, Type=Isolated
SW0 SW1 SW2 SW3 SW4 SW5 SW6 SW7 SW8 SW9: "OS102011MS2QN OS Series / Miniature Slide Switches 1-2 , 2-3 (on,on)"
T2: "PMV48XP"
TP1 TP2 TP3 TP4: "Test Point"
U1: "Cyclone IV Family FPGA, 2V Core, 179 I/O Pins, 2 PLLs, 256-Pin FBGA, Speed Grade 8, Commercial Grade", Supplier Part Number 1=EP4CE6F17C8-ND, Code_IPC=BGA100P16X16-256, Code_JEDEC=MS-034-AAF-1, ComponentLink1Description="Manufacturer Link", ComponentLink1URL=http://www.altera.com/, ComponentLink2Description=Handbook, ComponentLink2URL=http://www.altera.com/literature/hb/cyclone-iv/cyclone4-handbook.pdf, ComponentLink3Description="Pinout Specification", ComponentLink3URL=http://www.altera.com/literature/lit-dp.jsp?category=cyc%204&showspreadsheet=y, ComponentLink4Description="Packaging Specification", ComponentLink4URL=http://www.altera.com/literature/ds/dspkg.pdf, DatasheetVersion="ver1.2, Mar-2010", PackageDescription="256-Ball FineLine Ball Grid Array (FBGA256) - Option 1 - Wire Bond", PackageReference=FBGA256, PackageVersion="ver16.0, Dec-2009", Published=3-May-2010, Publisher="Altium Limited", Supplier 1=Digi-Key
U2: library part CLK_50M, "OSC 50MHZ 3.3V SMD", Supplier Part Number 1=535-9330-2-ND, Supplier 1=Digi-Key
U3: "3.3V 500mA Buck Converter", Supplier Part Number 1=MCP1603T-330I/OSCT-ND, Supplier 1=Digi-Key
U4: "1.2V, 2.5V 300mA LDO", Supplier Part Number 1=576-3150-1-ND, Supplier 1=Digi-Key
U5: "64Mb Serial Flash Memory", Supplier Part Number 1=706-1440-5-ND, Supplier 1=Digi-Key

## Free pads (board coordinates)
  round 255.91 hole 118.11: 2(-1968.5,-984.25) 2(-1968.5,1574.8) 2(1968.5,-984.25) 2(1968.5,1574.8)

## Via types
v1: diameter 19, hole 10, Top Layer to Bottom Layer, tented both sides, 111 vias
v2: diameter 20, hole 10, Top Layer to Bottom Layer, tented both sides, 72 vias
v3: diameter 35.43, hole 19.68, Top Layer to Bottom Layer, tented both sides, 23 vias

## Nets (pads, with @x,y where several pads share a name; then routed paths per layer and width w, separated by ;. In a path a pad name is that pad's centre, name@x,y a point inside that pad or via, vN(x,y) a via of type N, cw(c..) or ccw(c..) an arc to the next point about the centre after c; other vN are vias at no path point)
1V2: C16.1 C17.1 C18.1 C19.1 C24.1 FB1.1 FB2.1 TP3.0 U1.G6 U1.G7 U1.G8 U1.G9 U1.G10 U1.H6 U1.H11 U1.K7 U4.7 | length 3016.2
  Top Layer w6: -118.11,39.37 U1.G6@-98.42,59.06 -78.74,78.74 ; U1.G7@-59.05,59.06 -39.37,78.74 ; U1.G8@-19.68,59.06 0,78.74 ; U1.G9@19.69,59.06 39.37,78.74 ; U1.G10@59.06,59.06 v1(78.74,39.37)
  Top Layer w8: -118.11,39.37 U1.H6@-98.42,19.69 ; v1(-118.11,78.74) U1.G6@-98.42,59.06 ; v1(-78.74,-39.37) U1.K7@-59.05,-59.05 ; -78.74,78.74 U1.G7@-59.05,59.06 ; -39.37,78.74 U1.G8@-19.68,59.06 ; 0,78.74 U1.G9@19.69,59.06 ; 39.37,78.74 U1.G10@59.06,59.06 ; v1(78.74,39.37) U1.H11@98.43,19.69
  Top Layer w10: -1049.21,590.55 U4.7@-1049.21,609.25
  Top Layer w20: C24.1@-1049.21,556.1 -1049.21,590.55 ; C16.1@-403.54,-51.18 v2(-370.08,-51.18) ; C17.1@-403.54,0 v2(-370.08,0) ; v2(494.09,-23.62) C19.1@527.56,-23.62 ; v2(494.09,27.56) C18.1@527.56,27.56
  Top Layer w30: TP3.0@-1109.25,465.55 -1049.21,525.59 C24.1@-1049.21,556.1 ; v2(-530,-260) -506.54,-283.47 FB1.1@-475.39,-283.47
  Top Layer w32: v2(-1109.25,374.02) TP3.0@-1109.25,465.55
  Layer 3 w8: -259.84,-59.05 -145.67,-59.05 ; -244.28,137.98 -244.09,137.8 -145.67,137.8 -137.61,129.74 -137.61,110.03 -118.11,90.53 v1(-118.11,78.74) ; v1(78.74,39.37) 98.43,19.69 216.54,19.69
  Layer 3 w20: v2(-530,-260) -530,-180 -450,-100 -394.02,-100 -370.08,-76.06 v2(-370.08,-51.18) -370.08,-27.56 ; v2(-370.08,0) -370.08,-27.56 ; -259.84,-59.05 -275.59,-59.05 -307.09,-27.56 -370.08,-27.56 ; 216.54,19.69 232.28,19.69 251.97,0 494.09,0 ; v2(494.09,-23.62) 494.09,0 ; v2(494.09,27.56) 494.09,0
  Layer 3 w32: v2(-1109.25,374.02) -1034.45,299.21 -425.2,299.21 -280.51,154.53
2V5: C2.1 C3.1 C23.1 J1.4 R5.2 R6.2 R7.1 TP2.0 U1.F12 U1.H12 U1.L5 U4.8 | length 2695.1
  Top Layer w6: C2.1@-737.72,567.72 C2.1@-737.4,568.03
  Top Layer w8: v1(-157.48,-78.74) U1.L5@-137.79,-98.42 ; v1(118.11,39.37) U1.H12@137.8,19.69 ; v1(118.11,118.11) U1.F12@137.8,98.43
  Top Layer w10: U4.8@-1029.53,609.25 -1017.72,609.25
  Top Layer w15: C2.1@-737.4,568.03 C3.1@-737.4,617.72
  Top Layer w16: R5.2@-2301.18,3.94 -2301.18,127.95 -2277.35,151.79 -2025.8,151.79 J1.4@-1974.8,100.79
  Top Layer w20: -1017.72,609.25 -976.38,609.25 C23.1@-965.55,620.08
  Top Layer w30: J1.4@-1974.8,100.79 -1823.23,100.79 R7.1@-1803.15,80.71 ; C23.1@-965.55,620.08 -965.55,518.7 TP2.0@-912.4,465.55 -760.83,465.55 -669.29,374.02 -409.45,374.02 v2(-393.7,358.27)
  Layer 2 w8: v1(-157.48,-78.74) -157.11,-78.74 -137.61,-59.24 86.45,-59.24 98.43,-47.26 98.43,39.37 ; v1(118.11,39.37) 98.43,39.37 ; v1(118.11,118.11) 98.43,98.43 98.43,39.37
  Layer 3 w8: -271.65,236.22 -251.97,216.53 -149.59,216.53 -137.61,204.56 -137.61,188.77 -126.19,177.35 -110.4,177.35 -98.24,165.19 -98.24,149.4 -86.82,137.98 98.24,137.98 v1(118.11,118.11)
  Layer 3 w24: v2(-393.7,358.27) -271.65,236.22
3V3: C1.1 C8.1 C9.1 C10.1 C11.1 C12.1 C13.1 C14.1 C15.1 C20.1 C22.1 C25.1 L1.2 R1.2 R2.2 R3.2 TP1.0 U1.A1 U1.A16 U1.C4 U1.C7 U1.C10 U1.C13 U1.E3 U1.E14 U1.G3 U1.G14 U1.K3 U1.K14 U1.M3 U1.M14 U1.P4 U1.P7 U1.P10 U1.P13 U1.T1 U1.T16 U2.1 U2.4 U3.5 U4.1 U4.4 U4.5 U5.3 U5.7 U5.8 | length 2401.2
  Top Layer w6: L1.2@-1465.55,450 -1417,450 -1401.45,465.55 ; v2(-295.28,-393.7) U1.T1@-295.28,-295.27
  Top Layer w8: U4.5@-1088.58,609.25 -1109.25,629.92 -1109.25,680.12 U4.4@-1088.58,680.12 ; U4.1@-1029.53,680.12 -1019.19,690.45 -1018.7,689.96 ; -354.33,413.39 -295.28,354.33 U1.A1@-295.28,295.28 ; v1(-236.22,-118.11) U1.M3@-216.54,-137.8 ; v1(-236.22,-39.37) U1.K3@-216.54,-59.05 ; v1(-196.85,-196.85) U1.P4@-177.17,-216.53 ; v1(-196.85,236.22) U1.C4@-177.17,216.53 ; v1(157.48,236.22) U1.C13@177.17,216.53 ; v1(196.85,157.48) U1.E14@216.54,137.8
  Top Layer w12: -1018.7,689.96 -1013.78,694.88 C22.1@-1013.78,730.32
  Top Layer w16: U5.3@-1269.09,-13.78 -1269.09,-100.98 -1251.97,-118.11 -1149.6,-118.11 v2(-1098.42,-169.29) ; U2.4@-860.83,-138.96 U2.1@-860.83,-303.96 -790.77,-374.01
  Top Layer w24: U5.7@-1219.09,-293.31 U5.8@-1169.09,-293.31 -1112.2,-293.31 C25.1@-1102.36,-283.47
  Top Layer w30: -1401.45,465.55 TP1.0@-1280.51,465.55
  Layer 2 w6: v2(-295.28,-393.7) -295.28,-177.16 v1(-236.22,-118.11) -236.22,-157.48 v1(-196.85,-196.85) ; v1(-196.85,236.22) -196.85,393.7 ; v1(157.48,236.22) 157.48,452.76
  Layer 2 w8: v1(-236.22,-118.11) -216.53,-137.8 -185.21,-137.8 -177.35,-129.94 -177.35,-66.74 -185.04,-59.05 -206.69,-59.05 -226.38,-39.37 v1(-236.22,-39.37)
5V: HDMI.18
+5V: T2.1
+VIN: C21.1 T2.2 TP4.0 U3.1 U3.3 | length 440.7
  Top Layer w12: U3.3@-1550.2,696.87 -1570.87,717.53 -1570.87,797.24 -1560.04,808.07 -1490.16,808.07 -1450,767.91 -1450,761.81
  Top Layer w24: U3.1@-1475.4,696.87 -1475.4,747.04 -1460.63,761.81 -1450,761.81 -1349.41,761.81 TP4.0@-1348.42,760.83
ASDO: U1.C1 U5.5 | length 1465.9
  Top Layer w8: U5.5@-1319.09,-293.31 -1319.09,-180.9 -1354.33,-145.67 -1354.33,15.75 -1320.08,50 -623.23,50 -456.69,216.53 U1.C1@-295.28,216.53
CLK_50: U1.M1 U1.M15 U2.3 | length 1018.2
  Top Layer w8: v1(236.22,-118.11) U1.M15@255.91,-137.8
  Top Layer w12: U2.3@-660.83,-138.96 -661.42,-137.8 v2(-362.2,-137.8) U1.M1@-295.28,-137.8
  Layer 3 w8: v2(-362.2,-137.8) -322.83,-98.42 216.54,-98.42 v1(236.22,-118.11)
DATA0: U1.H2 U5.2 | length 1090.8
  Top Layer w6: -322.83,0 -275.59,0 U1.H2@-255.91,19.69
  Top Layer w8: U5.2@-1219.09,-13.78 -1219.09,-60.43 -1200.79,-78.74 v2(-1070.87,-78.74) ; v2(-992.13,-78.74) -953.39,-40 -618.74,-40 -539.37,39.37 -362.2,39.37 -322.83,0
  Layer 2 w8: v2(-1070.87,-78.74) v2(-992.13,-78.74)
DCLK: R4.1 U1.H1 | length 1238.6
  Top Layer w8: R4.1@-1214.57,-366.14 -1106.3,-366.14 -1031.5,-291.34 -1031.5,-74.8 -966.69,-10 -620.24,-10 -551.18,59.06 -334.65,59.06 U1.H1@-295.28,19.69
GND: C1.2 C2.2 C3.2 C4.2 C5.2 C6.2 C7.2 C8.2 C9.2 C10.2 C11.2 C12.2 C13.2 C14.2 C15.2 C16.2 C17.2 C18.2 C19.2 C20.2 C21.2 C22.2 C23.2 C24.2 C25.2 DA1.3 HDMI.2 HDMI.5 HDMI.8 HDMI.11 HDMI.17 HDMI.SHLD HEX0.6 HEX1.6 HEX2.6 HEX3.6 HEX4.6 HEX5.6 J1.2 J1.10 KEY0.2 KEY1.2 KEY2.2 KEY3.2 LEDR0.K LEDR1.K LEDR2.K LEDR3.K LEDR4.K LEDR5.K LEDR6.K LEDR7.K LEDR8.K LEDR9.K pad.2@1968.5,1574.8 pad.2@-1968.5,-984.25 R8.1 R35.1 R37.2 R38.2 R39.2 R40.2 SW0.2 SW1.2 SW2.2 SW3.2 SW4.2 SW5.2 SW6.2 SW7.2 SW8.2 SW9.2 U1.B2 U1.B15 U1.C5 U1.C12 U1.D7 U1.D10 U1.E1 U1.E2 U1.E4 U1.E12 U1.E13 U1.E15 U1.E16 U1.G4 U1.G12 U1.G13 U1.H7 U1.H8 U1.H9 U1.H10 U1.H13 U1.H15 U1.H16 U1.J3 U1.J7 U1.J8 U1.J9 U1.J10 U1.K4 U1.K13 U1.M2 U1.M4 U1.M5 U1.M13 U1.M16 U1.N7 U1.N10 U1.P5 U1.P12 U1.R2 U1.R15 U2.2 U3.2 U4.2 U5.4 | length 7631.5
  Top Layer w6: C2.2@-698.35,567.72 C2.2@-698.03,568.03 ; -417.32,157.48 -275.59,157.48 U1.E2@-255.91,137.8 ; U1.B2@-255.91,255.91 -236.22,275.59 -236.22,393.7 ; U1.M4@-177.17,-137.8 v1(-157.48,-118.11) ; U1.G12@137.8,59.06 v1(157.48,78.74) ; U1.E12@137.8,137.8 v1(157.48,157.48) ; 157.48,39.37 U1.G13@177.17,59.06 ; v1(236.22,-275.59) U1.R15@255.91,-255.9 ; U1.H15@255.91,19.69 275.59,0 417.32,0 ; U1.E15@255.91,137.8 275.59,118.11 417.32,118.11 ; U1.B15@255.91,255.91 275.59,275.59 ; U1.M16@295.28,-137.8 410.01,-137.8 508.43,-236.22 ; U1.H16@295.28,19.69 413.39,19.69
  Top Layer w8: v1(-275.59,-118.11) U1.M2@-255.91,-137.8 ; v1(-196.85,157.48) U1.E4@-177.17,137.8 ; v1(-157.48,-118.11) U1.M5@-137.79,-137.8 ; U1.J10@59.06,-19.68 39.37,0 ; v1(118.11,-196.85) U1.P12@137.8,-216.53 ; v1(118.11,78.74) U1.G12@137.8,59.06 ; v1(118.11,157.48) U1.E12@137.8,137.8 ; v1(157.48,-118.11) U1.M13@177.17,-137.8 ; v1(157.48,-39.37) U1.K13@177.17,-59.05 ; 157.48,39.37 U1.H13@177.17,19.69 ; v1(157.48,78.74) U1.G13@177.17,59.06 ; v1(157.48,157.48) U1.E13@177.17,137.8 ; U1.H7@-59.05,19.69 -78.74,0 U1.J7@-59.05,-19.68 -39.37,0 ; U1.H7@-59.05,19.69 -39.37,39.37 U1.H8@-19.68,19.69 ; U1.H7@-59.05,19.69 -39.37,0 ; -39.37,0 U1.J8@-19.68,-19.68 0,0 ; -39.37,0 U1.H8@-19.68,19.69 ; U1.H8@-19.68,19.69 0,0 ; U1.H8@-19.68,19.69 0,39.37 U1.H9@19.69,19.69 ; 0,0 U1.J9@19.69,-19.68 39.37,0 ; 0,0 U1.H9@19.69,19.69 ; U1.H9@19.69,19.69 39.37,0 ; U1.H9@19.69,19.69 39.37,39.37 U1.H10@59.06,19.69 39.37,0
  Top Layer w10: v3(-1975,-1400) -1925,-1350 LEDR9.K@-1900,-1350 ; v3(-1725,-1400) -1675,-1350 LEDR8.K@-1650,-1350 ; v3(-1475,-1400) -1425,-1350 LEDR7.K@-1400,-1350 ; v3(-1225,-1400) -1175,-1350 LEDR6.K@-1150,-1350 ; C22.2@-1064.96,730.32 -1049.21,714.57 U4.2@-1049.21,680.12 ; v3(-975,-1400) -925,-1350 LEDR5.K@-900,-1350 ; HEX5.6@-975,1325 -975,1265 v2(-950,1240) ; v3(-725,-1400) -675,-1350 LEDR4.K@-650,-1350 ; HEX4.6@-525,1325 -485,1325 v2(-460,1300) ; v3(-475,-1400) -425,-1350 LEDR3.K@-400,-1350 ; v3(-225,-1400) -175,-1350 LEDR2.K@-150,-1350 ; v2(-130,1250) -130,1270 HEX3.6@-75,1325 ; v3(25,-1400) 75,-1350 LEDR1.K@100,-1350 ; v3(275,-1400) 325,-1350 LEDR0.K@350,-1350 ; v2(310,1290) 345,1325 HEX2.6@375,1325 ; v3(500,-1500) 520,-1480 584.92,-1480 KEY3.2@591.42,-1473.5 ; v2(790,1230) 825,1265 HEX1.6@825,1325 ; v3(850,-1500) 871.76,-1478.23 KEY2.2@941.4,-1478.23 ; v3(1200,-1500) 1226.5,-1473.5 KEY1.2@1291.42,-1473.5 ; v2(1250,1240) 1275,1265 HEX0.6@1275,1325 ; v3(1550,-1500) 1576.5,-1473.5 KEY0.2@1641.42,-1473.5 ; DA1.3@1787.99,146.06 v3(1787.99,196.06)
  Top Layer w15: C2.2@-698.03,568.03 C3.2@-698.03,617.72
  Top Layer w16: C24.2@-1100.39,556.1 -1133.25,588.96 -1133.25,697.46 -1100.39,730.32 -1064.96,730.32 -1064.96,761.81 -1054.13,772.64 -989.17,772.64 -965.55,749.02 C23.2@-965.55,671.26
  Top Layer w20: v2(-488.19,-51.18) C16.2@-454.72,-51.18 ; v2(-488.19,0) C17.2@-454.72,0 ; C19.2@578.74,-23.62 v2(612.2,-23.62) ; C18.2@578.74,27.56 v2(612.2,27.56)
  Top Layer w24: -1529.53,761.81 -1522.15,754.43 -1512.8,745.09 U3.2@-1512.8,696.87 -1512.8,643.7 -1417.32,643.7 C20.2@-1406.5,654.53 ; U5.4@-1319.09,-13.78 -1319.09,-117.91 -1283.46,-153.54 -1187.01,-153.54 C25.2@-1102.36,-238.19 ; C1.2@-734.25,-374.01 -734.25,-316.57 -721.63,-303.96 U2.2@-660.83,-303.96 ; C4.2@-464.57,-171.26 v2(-379.92,-171.26) ; v2(393.7,145.67) 452.76,145.67 C7.2@460.63,153.54
  Layer 2 w6: 118.11,-472.44 v1(118.11,-196.85) ; v1(157.48,-118.11) 177.17,-137.8 442.91,-137.8 ; v1(157.48,-39.37) 177.17,-59.05 442.91,-59.05 ; v1(157.48,78.74) 177.17,59.06 442.91,59.06 ; v1(157.48,157.48) 177.17,137.8 344.49,137.8 364.17,118.11 462.6,118.11
  Layer 3 w8: -263.78,-145.67 -255.91,-137.8 -177.17,-137.8 v1(-157.48,-118.11) ; v1(118.11,157.48) 137.8,137.8 216.54,137.8
  Layer 3 w16: v2(-379.92,-171.26) -289.37,-171.26 -263.78,-145.67 ; 216.54,137.8 358.27,137.8 366.14,145.67 v2(393.7,145.67)
  other v2: -846.46,-413.39 -669.29,-413.39 -895.67,-383.86 -629.92,-383.86 -905.51,-226.38 -787.4,-78.74 -728.35,-78.74
HDMI.CLKn: DA1.2 HDMI.12 U1.P16 | length 2495.5
  Top Layer w6: U1.P16@295.28,-216.53 377.39,-216.54 475.82,-314.96 669.29,-314.96
  Top Layer w10: 669.29,-314.96 755.91,-314.96 770.47,-329.53 870,-329.53 1798.11,-329.53 HDMI.12@2012.6,-329.53 ; DA1.2@1819.49,146.06 1819.49,169.88 1866.14,216.54 v3(1870.08,216.54)
  Layer 2 w10: v2(1798.11,-329.29) 1893.7,-233.7 1893.7,-15.75 1944.88,35.43 1944.88,141.73 v3(1870.08,216.54)
HDMI.CLKp: DA1.4 HDMI.10 U1.N15 | length 2507.8
  Top Layer w6: U1.N15@255.91,-177.16 275.59,-196.85 385.55,-196.85 483.97,-295.28 669.29,-295.28
  Top Layer w10: 669.29,-295.28 755.91,-295.28 761.65,-289.53 870,-289.53 1773.11,-289.53 HDMI.10@2022.6,-289.53 ; v3(1712.6,216.54) 1755.91,173.23 1755.91,146.65 DA1.4@1756.5,146.06
  Layer 2 w10: v3(1712.6,216.54) 1633.86,137.8 1633.86,-3.94 1688.98,-59.06 1688.98,-210.16 v2(1773.11,-294.29)
HDMI.D0n: DA1.1 HDMI.9 U1.N16 | length 2246.3
  Top Layer w6: U1.N16@295.28,-177.16 393.7,-177.17 492.13,-275.59 669.29,-275.59
  Top Layer w10: 669.29,-275.59 708.66,-275.59 714.72,-269.53 870,-269.53 1800,-269.53 HDMI.9@2022.6,-269.53 ; DA1.1@1854.92,146.06 1854.92,129.33 1901.57,82.68 v3@1901.57,78.74
  Layer 2 w10: v2(1800,-265) 1800,-237.1 1870.08,-167.02 1870.08,3.94 1909.45,43.31 v3(1909.45,78.74)
HDMI.D0p: DA1.5 HDMI.7 U1.L15 | length 2253.2
  Top Layer w6: U1.L15@255.91,-98.42 275.59,-118.11 418.16,-118.11 516.59,-216.54 669.29,-216.54
  Top Layer w10: 669.29,-216.54 779.53,-216.54 794.09,-231.1 870,-231.1 1773.11,-231.1 HDMI.7@2012.6,-231.1 ; v3(1673.23,78.74) 1720.47,125.98 1720.47,145.47 DA1.5@1721.06,146.06
  Layer 2 w10: v3(1673.23,78.74) 1673.23,-3.94 1708.66,-39.37 1708.66,-153.66 1773.11,-218.11 v2(1773.11,-234.29)
HDMI.D1n: DA1.9 HDMI.6 U1.L16 | length 2094.8
  Top Layer w6: U1.L16@295.28,-98.42 426.32,-98.43 524.74,-196.85 669.29,-196.85
  Top Layer w10: 669.29,-196.85 826.77,-196.85 841.34,-211.42 870,-211.42 1798.11,-211.42 HDMI.6@2012.6,-211.42 ; v3@1839.17,47.24 DA1.9@1839.17,98.82
  Layer 2 w10: v2(1798.11,-209.29) 1798.58,-209.29 1838.58,-169.29 v3(1838.58,47.24) v3@1842.52,51.18
HDMI.D1p: DA1.6 HDMI.4 U1.K15 | length 2097.2
  Top Layer w6: U1.K15@255.91,-59.05 275.59,-78.74 434.47,-78.74 532.89,-177.17 669.29,-177.17
  Top Layer w10: 669.29,-177.17 838.58,-177.17 843.7,-172.05 870,-172.05 1770,-172.05 HDMI.4@2012.6,-172.05 ; v3@1736.81,2.24 DA1.6@1736.81,98.82
  Layer 2 w10: v3@1736.22,3.94 1736.22,-141.22 v2(1770,-175)
  other v3: 1737.99,1.06
HDMI.D2n: DA1.8 HDMI.3 U1.K16 | length 2014.8
  Top Layer w6: U1.K16@295.28,-59.05 442.62,-59.06 541.05,-157.48 665.35,-157.48 669.29,-157.48
  Top Layer w10: 669.29,-157.48 791.34,-157.48 796.46,-152.36 870,-152.36 1800,-152.36 HDMI.3@2012.6,-152.36 ; v3@1803.74,1.06 DA1.8@1803.74,98.82
  Layer 2 w10: v2(1800,-150) 1800,-3.15 v3@1803.15,0 ; v3@1803.15,-3.94 v3@1807.09,0
  other v3: 1802.99,1.06
HDMI.D2p: DA1.7 HDMI.1 U1.J15 | length 2030.8
  Top Layer w6: U1.J15@255.91,-19.68 275.59,-39.37 450.78,-39.37 549.2,-137.79 669.29,-137.79
  Top Layer w10: 669.29,-137.8 755.91,-137.8 780.71,-112.99 870,-112.99 1770,-112.99 HDMI.1@2012.6,-112.99 ; v3@1772.24,46.81 DA1.7@1772.24,98.82
  Layer 2 w10: v2(1770,-115) 1770,45.59 v3@1771.65,47.24
  other v3: 1772.99,46.06
HDMI.HSD: R36.2 U1.P15 | length 1980.4
  Top Layer w6: U1.P15@255.91,-216.53 275.59,-236.22 369.24,-236.22 467.66,-334.65 669.29,-334.65
  Top Layer w10: 669.29,-334.65 728.35,-393.7 1233.7,-393.7 1611.65,-771.65 1923.35,-771.65 1950,-745 R36.2@1950,-699.68
HEX0.A: RA5.16 U1.A3 | length 747.3
  Top Layer w8: RA5.16@-511.81,814.96 -511.81,708.98 -503.94,701.1 -503.94,677.17 -519.69,661.42 -519.69,559.06 -452.76,492.13 -295.28,492.13 -216.54,413.39 U1.A3@-216.54,295.28
HEX0.B: RA5.10 U1.C2 | length 838.8
  Top Layer w6: -354.33,275.59 -314.96,236.22 -275.59,236.22
  Top Layer w8: RA5.10@-629.92,814.96 -629.92,708.66 -635.6,702.98 -635.6,674.97 -622.05,661.42 -622.05,543.31 -492.13,413.39 -393.7,413.39 -354.33,374.02 -354.33,275.59 ; -275.59,236.22 U1.C2@-255.91,216.53
HEX0.C: RA5.13 U1.E5 | length 928
  Top Layer w6: v2@-570.86,649.61 v2(-566.93,649.61)
  Top Layer w8: v2@-570.86,649.61 RA5.13@-570.86,814.96 ; v1(-157.48,157.48) U1.E5@-137.79,137.8
  Layer 2 w6: v2(-566.93,649.61) -566.93,614.17 -566.93,606.3 -531.5,570.87 -492.13,570.87 -312.8,391.54 -312.8,234.06 -255.91,177.16 -177.16,177.16 v1(-157.48,157.48)
HEX0.D: RA5.12 U1.B1 | length 789.6
  Top Layer w6: U1.B1@-295.28,255.91 -275.59,275.59 -275.59,374.02
  Top Layer w8: RA5.12@-590.55,814.96 -590.55,708.66 -584.86,702.97 -584.86,674.98 -598.43,661.42 -598.43,559.06 -472.44,433.07 -334.65,433.07 -275.59,374.02
HEX0.DP: RA5.11 U1.F4 | length 953.6
  Top Layer w6: v1(-196.85,118.11) U1.F4@-177.17,98.43
  Top Layer w8: v2(-610.23,688.98) RA5.11@-610.23,814.96
  Layer 2 w6: v2(-610.23,688.98) -610.23,590.55 -551.18,531.5 -492.13,531.5 -334.65,374.02 -334.65,354.33 -324.8,344.49 -324.8,206.69 -255.9,137.8 -229.74,137.8 -210.06,118.11 v1(-196.85,118.11)
HEX0.E: RA5.9 U1.F3 | length 976.6
  Top Layer w8: v2(-649.6,649.61) RA5.9@-649.6,814.96 ; v1(-236.22,118.11) U1.F3@-216.54,98.43
  Layer 2 w6: v2(-649.6,649.61) -649.6,570.86 -649.6,531.49 -610.24,492.13 -511.8,492.13 -433.06,413.39 -413.37,413.39 -374.01,374.03 -336.8,336.83 -336.8,199.01 -255.9,118.11 v1(-236.22,118.11)
HEX0.F: RA5.14 U1.A2 | length 727.4
  Top Layer w8: RA5.14@-551.18,814.96 -551.18,704.73 -556.86,699.04 -556.86,674.97 -543.31,661.42 -543.31,543.31 -452.76,452.76 -314.96,452.76 -255.91,393.7 U1.A2@-255.91,295.28
HEX0.G: RA5.15 U1.C3 | length 754.3
  Top Layer w6: v2@-531.49,688.98 v2(-527.56,688.98)
  Top Layer w8: v2@-531.49,688.98 RA5.15@-531.49,814.96 ; v1(-236.22,236.22) U1.C3@-216.54,216.53
  Layer 2 w6: v2(-527.56,688.98) -527.56,653.54 -527.56,645.67 -492.13,610.24 -413.39,531.5 -374.02,531.5 -236.22,393.7 v1(-236.22,236.22)
HEX1.A: RA4.9 U1.D3 | length 980
  Top Layer w8: v2(-472.44,649.61) RA4.9@-472.44,1011.81 ; v1(-236.22,196.85) U1.D3@-216.54,177.16
  Layer 2 w6: v2(-472.44,649.61) -472.44,629.92 -452.76,610.24 -393.7,551.18 -354.33,551.18 -216.54,413.39 -216.54,216.53 v1(-236.22,196.85)
HEX1.B: RA4.10 U1.B3 | length 944
  Top Layer w6: U1.B3@-216.54,255.91 -196.85,275.59 -196.85,433.07
  Top Layer w8: RA4.10@-452.76,1011.81 -452.75,708.66 -458.44,702.98 -458.44,674.98 -444.88,661.42 -444.88,562.99 -393.7,511.81 -275.59,511.81 -196.85,433.07
HEX1.C: RA4.11 U1.D4 | length 980
  Top Layer w8: v2(-433.07,688.98) RA4.11@-433.07,1011.81 ; v1(-196.85,196.85) U1.D4@-177.17,177.16
  Layer 2 w6: v2(-433.07,688.98) -433.07,629.92 -393.7,590.55 -354.33,590.55 -177.17,413.39 -177.17,216.53 v1(-196.85,196.85)
HEX1.D: RA4.13 U1.D5 | length 980
  Top Layer w8: v2(-393.7,649.61) RA4.13@-393.7,1011.81 ; v1(-157.48,196.85) U1.D5@-137.79,177.16
  Layer 2 w6: v2(-393.7,649.61) -393.7,629.92 -374.02,610.24 -334.65,610.24 -137.79,413.39 -137.79,216.53 v1(-157.48,196.85)
HEX1.DP: RA4.12 U1.A4 | length 860.2
  Top Layer w8: RA4.12@-413.39,1011.81 -413.38,710.41 -407.7,704.72 -407.7,674.98 -421.26,661.42 -421.26,637.8 -314.96,531.5 -255.91,531.5 -177.17,452.76 -177.17,433.07 U1.A4@-177.17,295.28
HEX1.E: RA4.16 U1.A5 | length 798.1
  Top Layer w8: RA4.16@-334.65,1011.81 -334.64,704.72 -137.8,507.87 -137.8,413.39 U1.A5@-137.79,295.28
HEX1.F: RA4.15 U1.C6 | length 901.3
  Top Layer w8: v2(-354.33,688.98) RA4.15@-354.33,1011.81 ; v1(-118.11,236.22) U1.C6@-98.42,216.53
  Layer 2 w6: v2@-354.33,688.98 -118.11,452.76 v1(-118.11,236.22)
HEX1.G: RA4.14 U1.B4 | length 870
  Top Layer w6: U1.B4@-177.17,255.91 -157.48,275.59 -157.48,417.32
  Top Layer w8: RA4.14@-374.02,1011.81 -374.01,697.58 -379.7,691.89 -379.7,674.98 -255.91,551.18 -236.22,551.18 -157.48,472.44 -157.48,417.32
HEX2.A: RA3.9 U1.D6 | length 932.5
  Top Layer w8: v2(-295.28,846.46) RA3.9@-295.28,1011.81 ; v1(-118.11,196.85) U1.D6@-98.42,177.16
  Layer 2 w6: v2(-295.28,846.46) -295.28,696.85 -98.42,500 -98.42,216.53 v1(-118.11,196.85)
HEX2.B: RA3.10 U1.B5 | length 829.3
  Top Layer w6: -275.59,748.03 RA3.10@-275.59,1011.81 ; U1.B5@-137.79,255.91 -118.11,275.59 -118.11,590.55
  Top Layer w8: -275.59,748.03 -118.11,590.55
HEX2.C: RA3.11 U1.C8 | length 893.1
  Top Layer w6: v2(-255.91,885.83) RA3.11@-255.91,1011.81
  Top Layer w8: v1(-39.37,236.22) U1.C8@-19.68,216.53
  Layer 2 w6: v2(-255.91,885.83) -255.91,681.1 -39.37,464.57 v1(-39.37,236.22)